# EAGLE board hello.master (EAGLE 8.6.3)
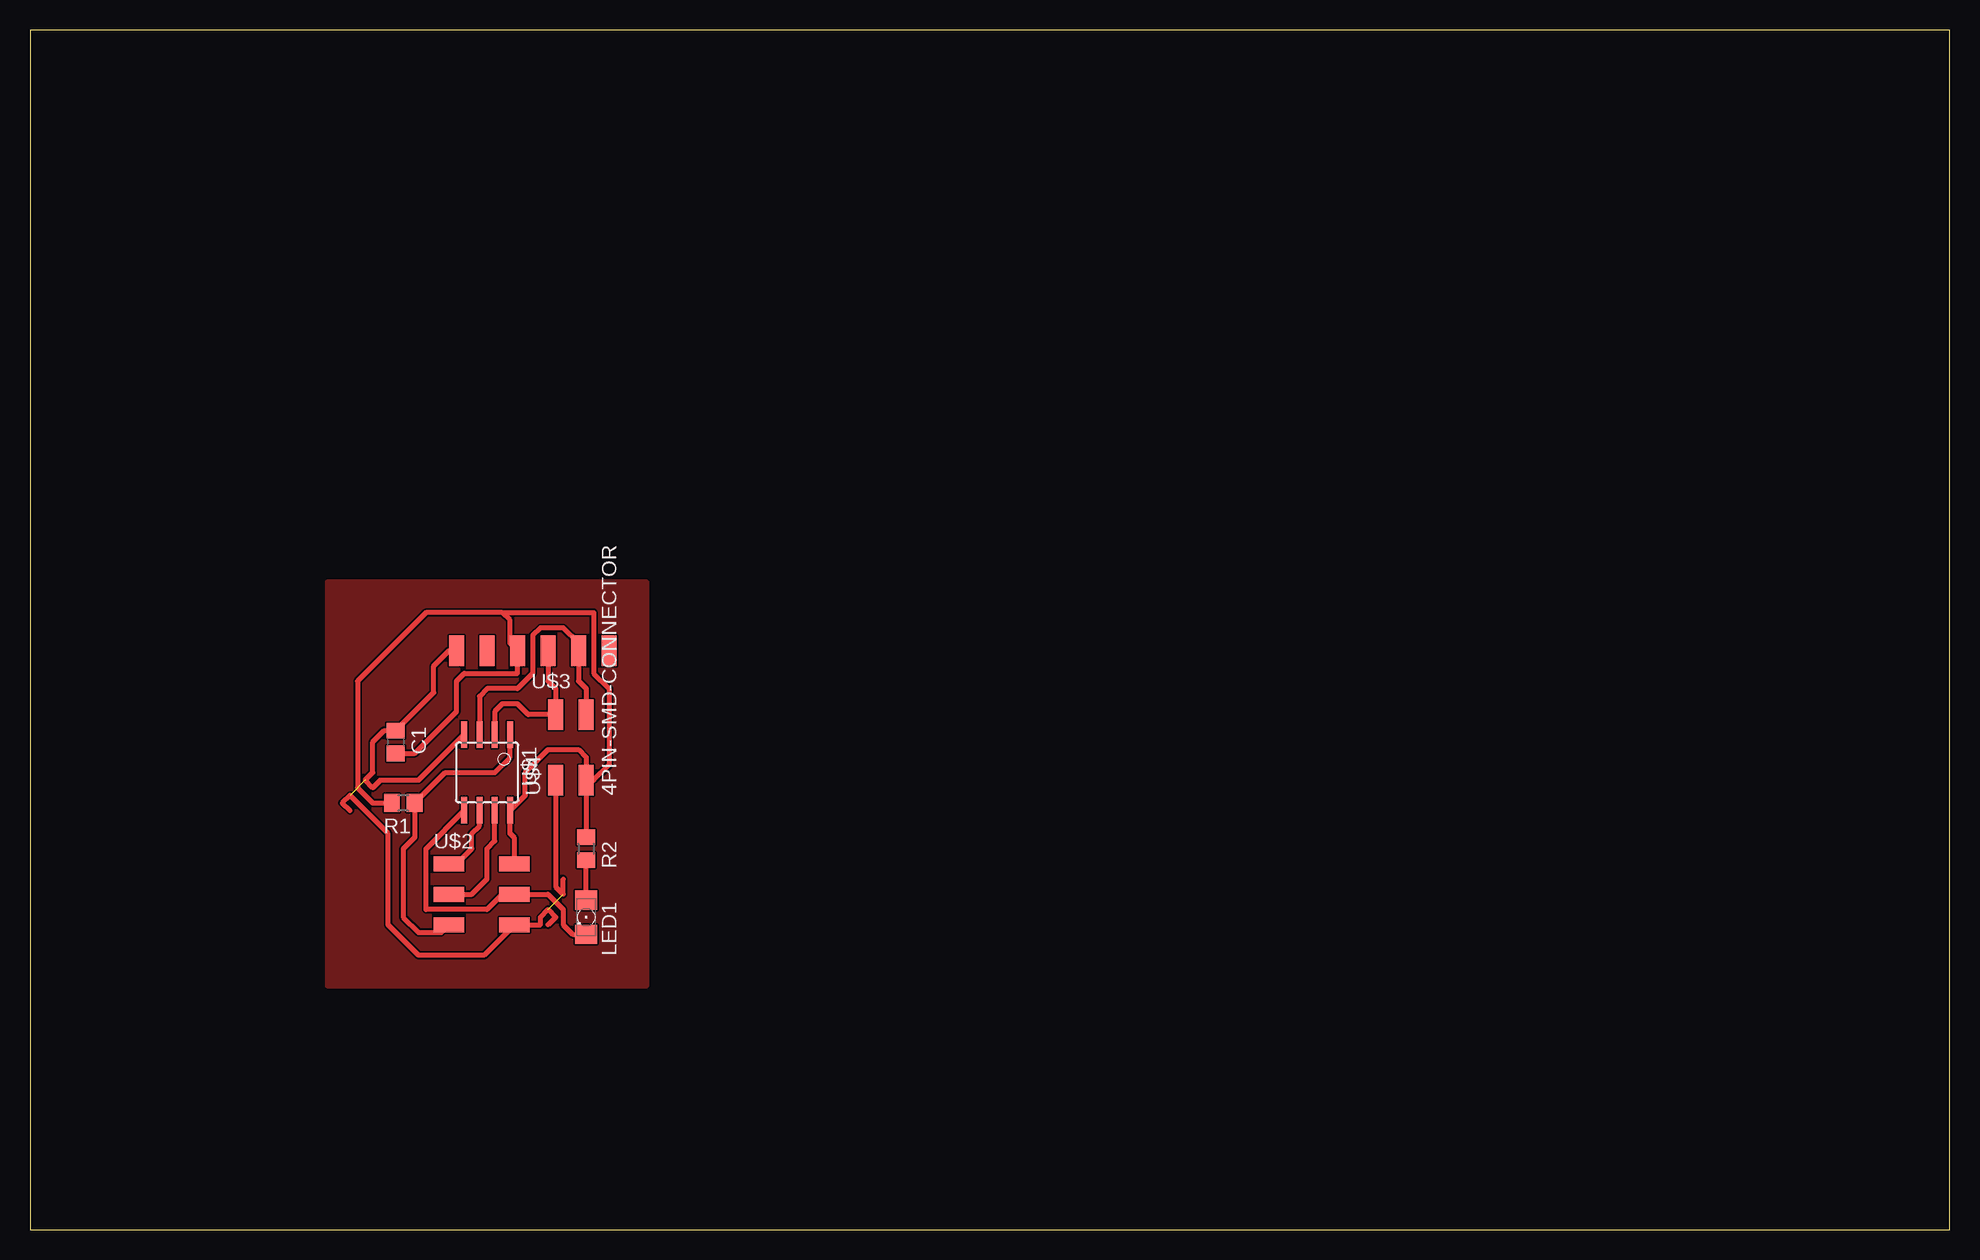
[diagram p0: board, top side]

Size 160 x 100 mm. Coordinates in mm from the lower left corner, seen from the top.
Outline: 0,0 160,0 160,100 0,100 0,0
Copper layers (1*16): Top 0.035mm / dielectric 1.5mm / Bottom 0.035mm
Design rules "default": minimum track width 6mil, minimum drill 0.35mm, track to track 6mil, track to pad 6mil, pad to pad 6mil, via to via 6mil, smd to smd 6mil, copper to edge 40mil, drill to drill 6mil, minimum pad ring 10mil, minimum via ring 8mil, stop-mask expansion 4mil, vias tented up to drill 0mil, thermal gap 10mil

## Footprints (pad centres in the part's own frame; a part is rotated, then mirrored left to right if it is on the bottom)
C0805 = smd 1.3 x 1.5: 1 -0.95,0; 2 0.95,0
LED_1206 = smd 1.6 x 1.803: A -1.422,0; C 1.422,0
R0805 = smd 1.3 x 1.5: 1 -0.95,0; 2 0.95,0
SOIC8 = smd 0.5 x 2.2: 1 -1.905,-3.154; 2 -0.645,-3.154; 3 0.625,-3.154; 4 1.895,-3.154; 5 1.905,3.154; 6 0.635,3.154; 7 -0.635,3.154; 8 -1.905,3.154
2X03SMD = smd 2.54 x 1.27: 1 -2.54,2.54; 2 2.92,2.54; 3 -2.54,0; 4 2.92,0; 5 -2.54,-2.54; 6 2.92,-2.54
1X06SMD = smd 2.54 x 1.27: 1 0,6.35; 2 0,3.81; 3 0,1.27; 4 0,-1.27; 5 0,-3.81; 6 0,-6.35
2X02SMD = smd 2.54 x 1.27: 1 -2.54,1.27; 2 2.92,1.27; 3 -2.54,-1.27; 4 2.92,-1.27

## Placement (x,y rotation side)
C1  [C0805]  30.48,40.64 270 top
LED1  [LED_1206]  46.35,26.04 270 top
R1  10k  [R0805]  31.11,35.56 180 top
R2  10k  [R0805]  46.35,31.75 270 top
U$1  ATTINY45SI  [SOIC8]  38.1,38.1 180 top
U$2  AVRISPSMD  [2X03SMD]  37.47,27.94 0 top
U$3  FTDI-SMD-HEADER  [1X06SMD]  41.91,48.26 90 top
U$4  4PIN-SMD-CONNECTOR  [2X02SMD]  45.09,40.01 90 top

## Library data of the parts
C1 = eagle-ltspice; SPICEMODEL: NONE; SPICEPREFIX: C
LED1 = eagle-ltspice; SPICEMODEL: NONE; SPICEPREFIX: D; SPICETYPE: diode
R1 R2 = eagle-ltspice; SPICEMODEL: NONE; SPICEPREFIX: R
U$1-U$4 = fab

## Nets
GND: C1.1 U$1.4 U$2.6 U$3.1 U$4.1
MISO: U$1.6 U$2.1
MOSI: LED1.C U$1.5 U$2.4
N$3: LED1.A R2.2
RESET: R1.1 U$1.1 U$2.5
RX: U$1.3 U$3.5 U$4.4
SCK: U$1.7 U$2.3
TX: U$1.2 U$3.4 U$4.2
VCC: C1.2 R1.2 R2.1 U$1.8 U$2.2 U$3.3 U$4.3

## Tracks (layer width: path | path; a pad name or v marks a point on that pad's centre or on a via)
GND  (2 unrouted)
  Top 0.406: 30.79,41.9 C1.1 | U$1.4 32.42,37.47 32.39,37.46 32.38,37.47 29.21,37.47 28.57,36.83 27.94,37.47 28.57,38.1 28.57,40.64 29.52,41.59 C1.1 | C1.1 33.66,44.77 33.66,46.99 34.92,48.26 U$3.1 | U$4.1 43.81,28.57 44.45,27.94 44.45,29.21 | 43.18,25.4 43.81,26.04 43.18,26.67 42.55,26.04 42.55,25.4 U$2.6 37.84,22.86 32.38,22.86 29.84,25.4 29.84,33.02 26.67,36.2 26.04,35.56 26.67,34.92
MISO
  Top 0.406: U$2.1 35.56,30.48 36.83,31.75 36.83,33.02 37.47,33.66 U$1.6
MOSI
  Top 0.406: U$1.5 36.2,34.92 33.02,31.75 33.02,26.67 38.1,26.67 39.37,27.94 U$2.4 43.18,27.94 44.45,26.67 44.45,25.4 45.24,24.61 LED1.C
N$1
  pour Top: 24.77,53.98 24.77,20.32 51.44,20.32 51.44,53.98
N$3
  Top 0.406: LED1.A R2.2
RESET
  Top 0.406: U$1.1 40.01,39.37 38.73,38.1 34.6,38.1 R1.1 32.06,32.7 31.11,31.75 31.11,26.04 32.38,24.77 34.29,24.77 U$2.5
RX
  Top 0.406: U$4.4 46.35,45.09 45.72,45.72 U$3.5 45.72,48.9 44.45,50.16 42.55,50.16 41.91,49.53 41.91,46.35 40.64,45.09 38.1,45.09 37.47,44.45 37.48,44.44 U$1.3
SCK
  Top 0.406: U$2.3 36.83,27.94 38.1,29.21 38.1,31.75 38.73,32.38 U$1.7
TX
  Top 0.406: U$3.4 43.18,45.72 43.81,45.09 U$4.2 41.53,42.92 40.64,43.81 39.37,43.81 38.73,43.18 38.73,41.26 U$1.2
VCC
  Top 0.406: 41.27,36.2 41.25,36.2 | 41.25,36.2 U$1.8 40.01,33.02 40.38,32.64 U$2.2 | U$4.3 R2.1 | 41.25,36.2 41.27,36.22 41.27,38.1 43.18,40.01 45.72,40.01 46.35,39.37 U$4.3 | 30.16,39.38 C1.2 32.07,39.69 35.56,43.18 35.56,45.72 36.2,46.35 40.64,46.35 U$3.3 40.01,48.9 40.01,50.8 39.37,51.44 | R1.2 28.57,35.56 27.3,36.83 27.3,45.72 33.02,51.44 39.37,51.44 | 39.37,51.44 46.99,51.44 46.99,46.35 48.26,45.09 48.26,38.73 46.99,37.47 U$4.3